# Altium PCB A5_KALIP.PcbDoc
Units mm, origin at the board's own origin, x right, y up, seen from the top; angles counter-clockwise.
Board outline 153.5 x 220 mm, 4 copper layers (Top Layer, Mid-Layer 1, Mid-Layer 2, Bottom Layer); 108 components, 0 nets, 376 pads, 72 vias.
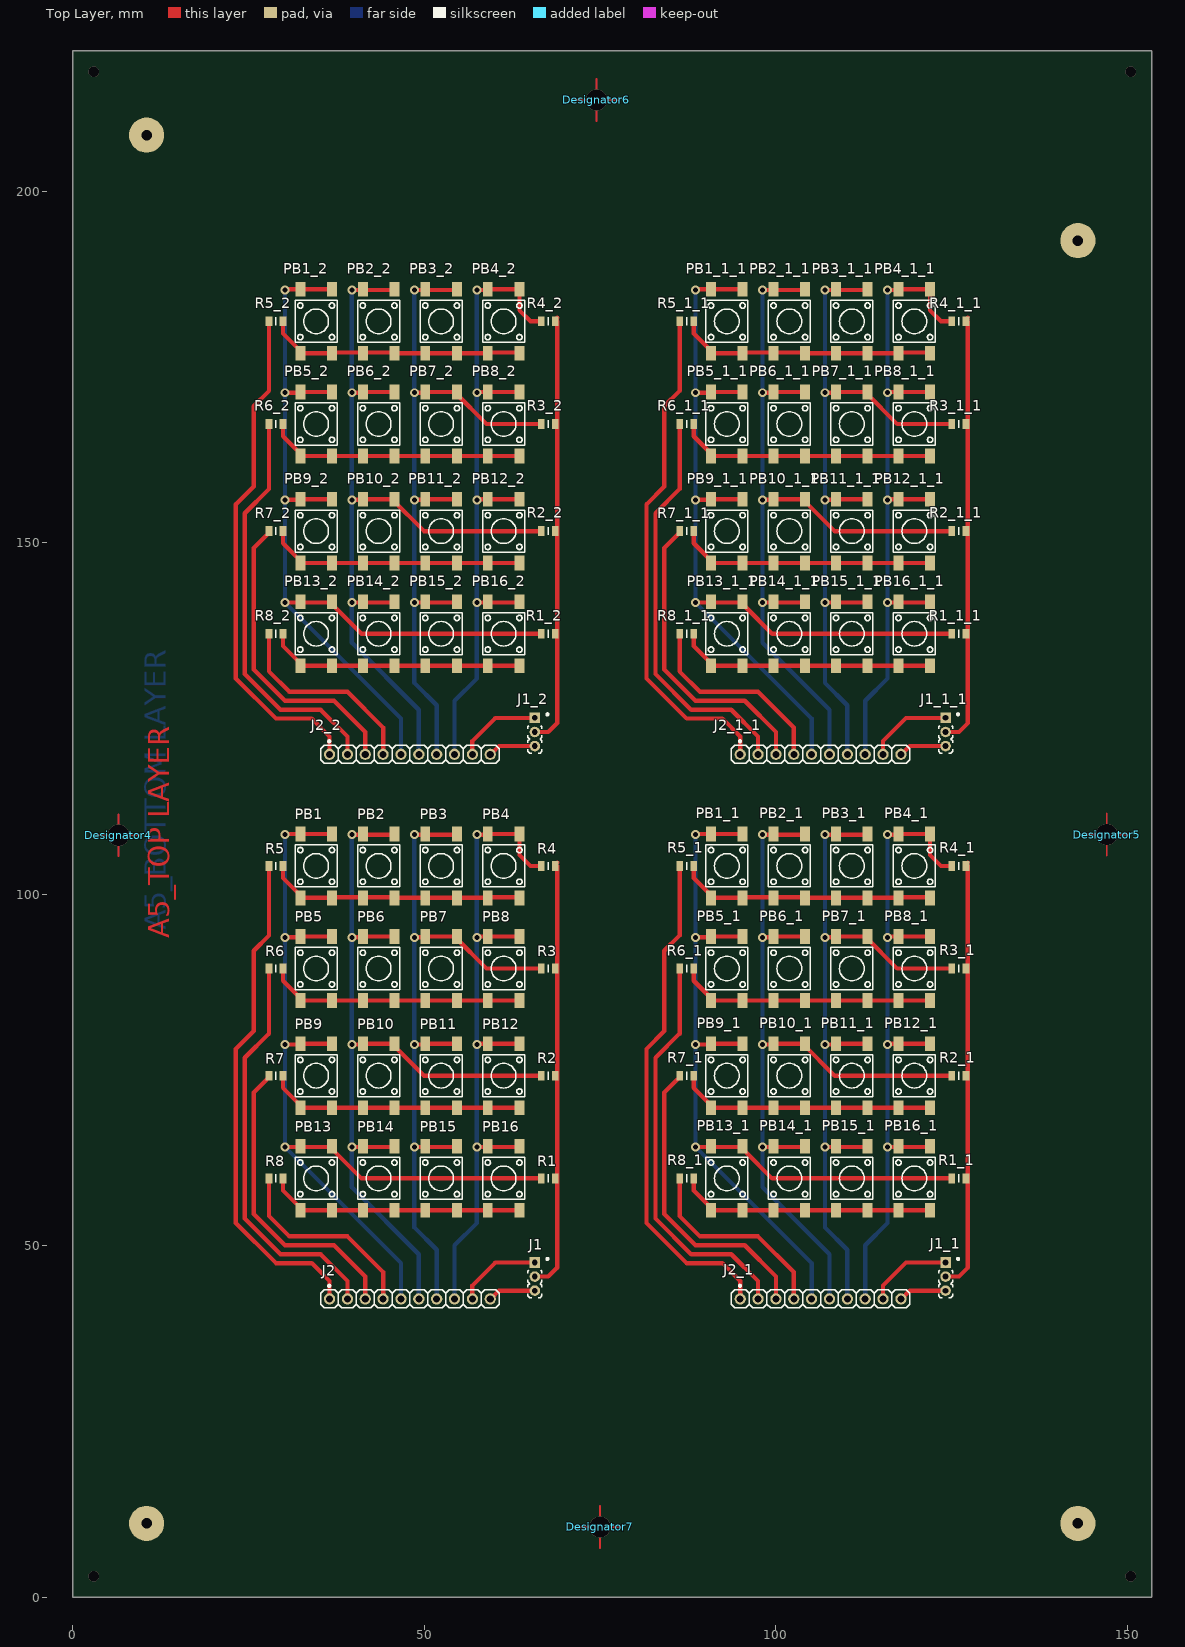
[diagram p0: Top Layer view]
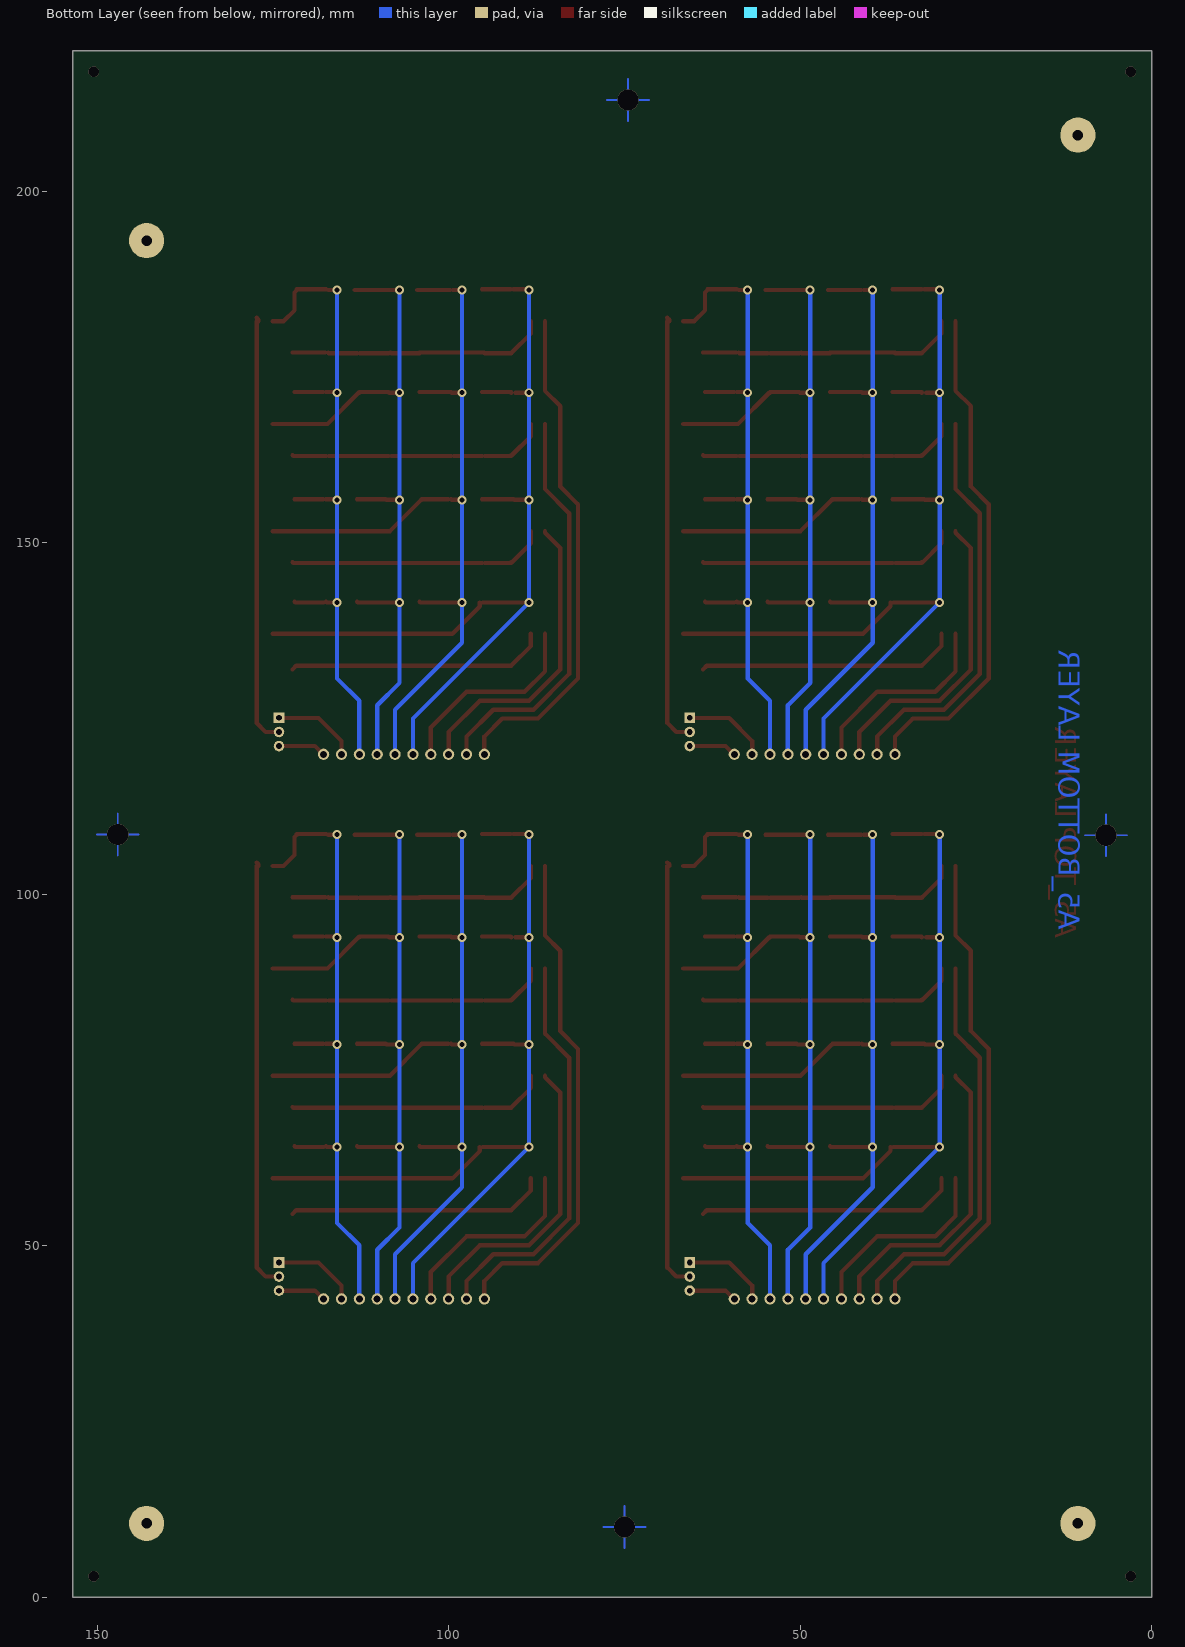
[diagram p1: Bottom Layer view, seen from below]
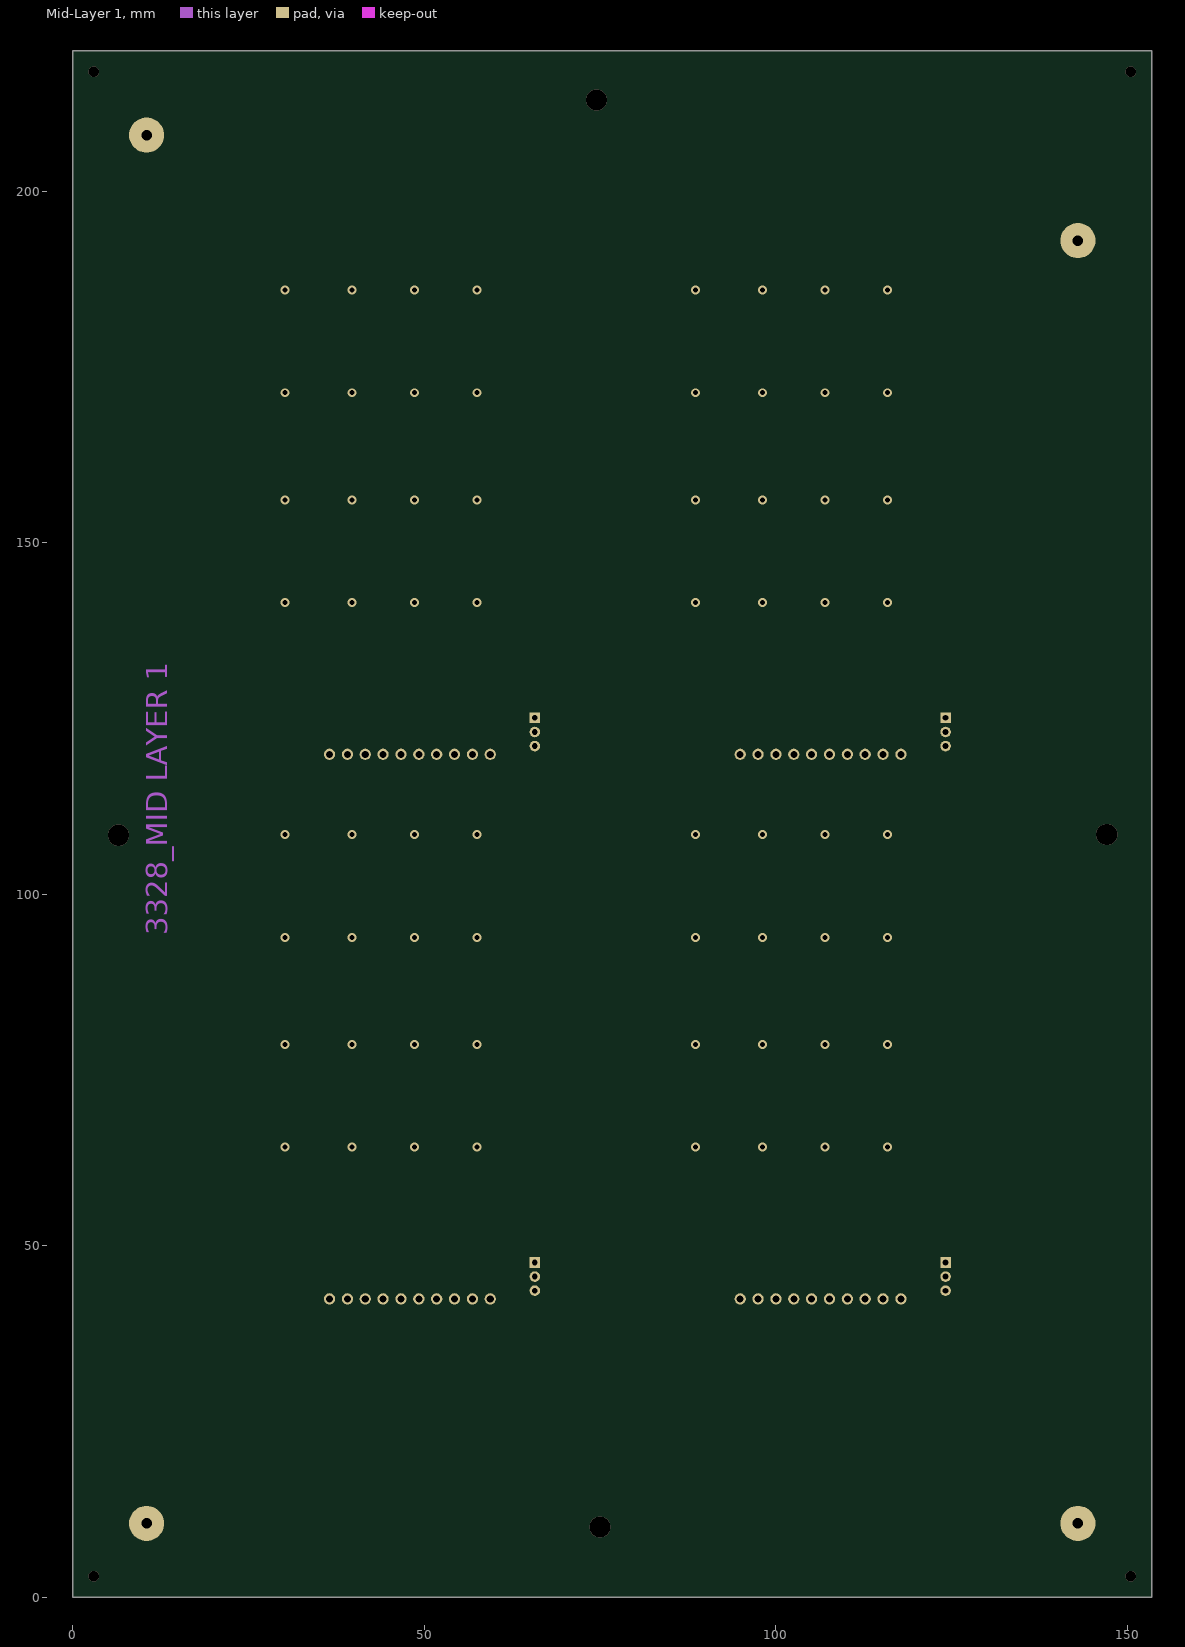
[diagram p2: Mid-Layer 1]
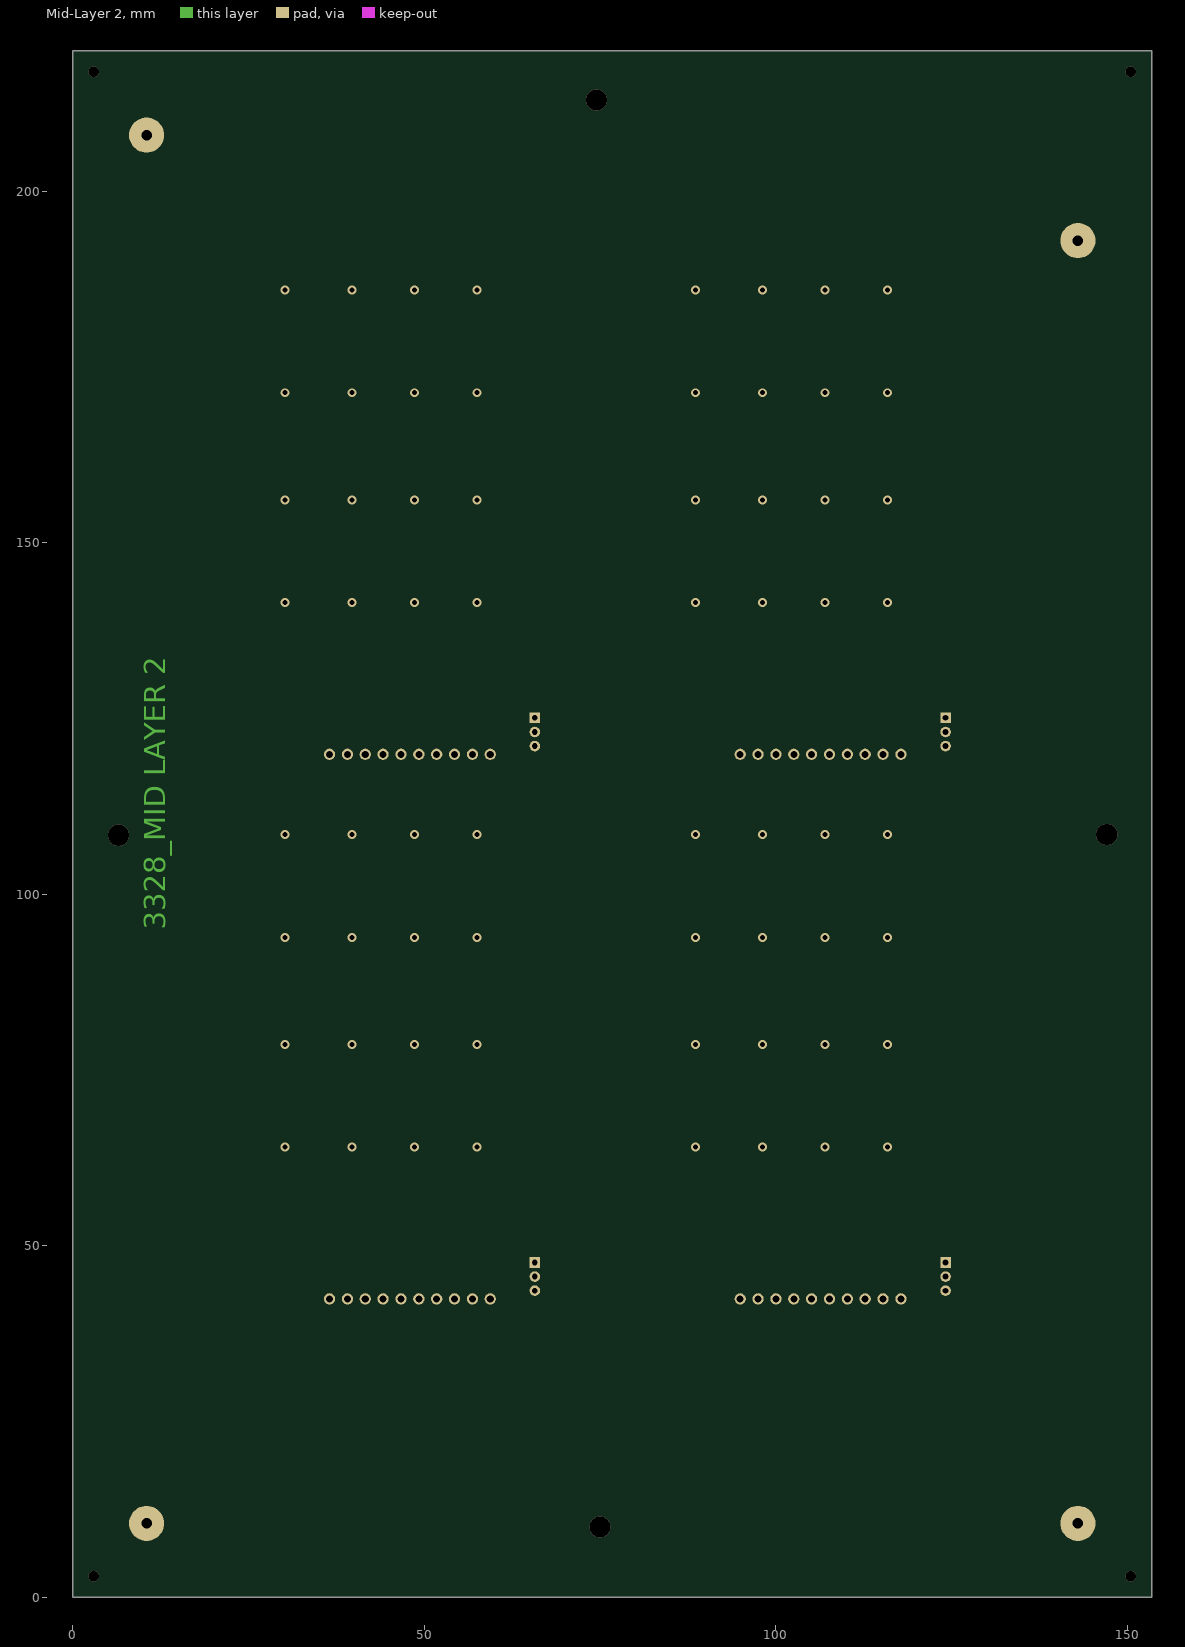
[diagram p3: Mid-Layer 2]

## Layer stack, top to bottom
Top Solder: solder mask 0.0102, Solder Resist, Dk 3.5
Top Layer: signal copper 0.0356
Dielectric 1: dielectric 0.32, FR-4, Dk 4.8
Mid-Layer 1: signal copper 0.0356
Dielectric2: dielectric 0.32, FR-4, Dk 4.8
Mid-Layer 2: signal copper 0.0356
Dielectric3: dielectric 0.32, FR-4, Dk 4.8
Bottom Layer: signal copper 0.0356
Bottom Solder: solder mask 0.0102, Solder Resist, Dk 3.5

## Board outline
0,0 0,220 153.5,220 153.5,0

## Design rules (kind name [scope] priority, off if disabled: settings)
Clearance [All] p1: gap=0.254 ignorepadtopadclearanceinfootprint=FALSE except(0: Arc-Hole Track-Hole SMDPad-Hole THPad-Hole Via-Hole Fill-Hole Poly-Hole Region-Hole Text-Hole)
PolygonConnect [All] p1: connectstyle=Relief reliefconductorwidth=0.254 reliefentries=4 polygonreliefangle="90 Angle" airgapwidth=0.254
RoutingVias [All] p1: holewidth=0.711 width=1.27 viastyle="Through Hole" minholewidth=0.711 minwidth=1.27 maxholewidth=0.711 maxwidth=1.27
SolderMaskExpansion SolderMaskExpansion_Via [IsVia] p1: expansion=0.102 istentingtop=TRUE
SolderMaskExpansion [All] p2: expansion=0.125 istentingtop=FALSE
Width [All] p1: maxlimit=0.254 minlimit=0.254 preferedwidth=0.254
30 further rules are at their usual default settings.

## Components (designator, comment, footprint, x,y, rotation, side; value= is the part's Value field where it differs from the comment)
Designator4 "Comment" PCBCOMPONENT_1 6.5,108.4 r0 top
Designator5 "Comment" PCBCOMPONENT_1 147.1,108.5 r0 top
Designator6 "Comment" PCBCOMPONENT_1 74.5,213 r0 top
Designator7 "Comment" PCBCOMPONENT_1 75,10 r0 top
J1 "" HARWIN_M22-2010305 65.74,47.62 r270 top
J1_1 "" HARWIN_M22-2010305 124.16,47.62 r270 top (schematic designator J1)
J1_1_1 "" HARWIN_M22-2010305 124.16,125.09 r270 top (schematic designator J1)
J1_2 "" HARWIN_M22-2010305 65.74,125.09 r270 top (schematic designator J1)
J2 "" SIP10 36.53,42.445 r0 top
J2_1 "" SIP10 94.95,42.445 r0 top (schematic designator J2)
J2_1_1 "" SIP10 94.95,119.915 r0 top (schematic designator J2)
J2_2 "" SIP10 36.53,119.915 r0 top (schematic designator J2)
PB1 "" PB_TYCO_FSM6JSMA 34.625,104.04 r0 top
PB1_1 "" PB_TYCO_FSM6JSMA 93.045,104.04 r0 top (schematic designator PB1)
PB1_1_1 "" PB_TYCO_FSM6JSMA 93.045,181.51 r0 top (schematic designator PB1)
PB1_2 "" PB_TYCO_FSM6JSMA 34.625,181.51 r0 top (schematic designator PB1)
PB2 "" PB_TYCO_FSM6JSMA 43.515,104.04 r0 top
PB2_1 "" PB_TYCO_FSM6JSMA 101.935,104.04 r0 top (schematic designator PB2)
PB2_1_1 "" PB_TYCO_FSM6JSMA 101.935,181.51 r0 top (schematic designator PB2)
PB2_2 "" PB_TYCO_FSM6JSMA 43.515,181.51 r0 top (schematic designator PB2)
PB3 "" PB_TYCO_FSM6JSMA 52.405,104.04 r0 top
PB3_1 "" PB_TYCO_FSM6JSMA 110.825,104.04 r0 top (schematic designator PB3)
PB3_1_1 "" PB_TYCO_FSM6JSMA 110.825,181.51 r0 top (schematic designator PB3)
PB3_2 "" PB_TYCO_FSM6JSMA 52.405,181.51 r0 top (schematic designator PB3)
PB4 "" PB_TYCO_FSM6JSMA 61.295,104.04 r0 top
PB4_1 "" PB_TYCO_FSM6JSMA 119.715,104.04 r0 top (schematic designator PB4)
PB4_1_1 "" PB_TYCO_FSM6JSMA 119.715,181.51 r0 top (schematic designator PB4)
PB4_2 "" PB_TYCO_FSM6JSMA 61.295,181.51 r0 top (schematic designator PB4)
PB5 "" PB_TYCO_FSM6JSMA 34.625,89.435 r0 top
PB5_1 "" PB_TYCO_FSM6JSMA 93.045,89.435 r0 top (schematic designator PB5)
PB5_1_1 "" PB_TYCO_FSM6JSMA 93.045,166.905 r0 top (schematic designator PB5)
PB5_2 "" PB_TYCO_FSM6JSMA 34.625,166.905 r0 top (schematic designator PB5)
PB6 "" PB_TYCO_FSM6JSMA 43.515,89.435 r0 top
PB6_1 "" PB_TYCO_FSM6JSMA 101.935,89.435 r0 top (schematic designator PB6)
PB6_1_1 "" PB_TYCO_FSM6JSMA 101.935,166.905 r0 top (schematic designator PB6)
PB6_2 "" PB_TYCO_FSM6JSMA 43.515,166.905 r0 top (schematic designator PB6)
PB7 "" PB_TYCO_FSM6JSMA 52.405,89.435 r0 top
PB7_1 "" PB_TYCO_FSM6JSMA 110.825,89.435 r0 top (schematic designator PB7)
PB7_1_1 "" PB_TYCO_FSM6JSMA 110.825,166.905 r0 top (schematic designator PB7)
PB7_2 "" PB_TYCO_FSM6JSMA 52.405,166.905 r0 top (schematic designator PB7)
PB8 "" PB_TYCO_FSM6JSMA 61.295,89.435 r0 top
PB8_1 "" PB_TYCO_FSM6JSMA 119.715,89.435 r0 top (schematic designator PB8)
PB8_1_1 "" PB_TYCO_FSM6JSMA 119.715,166.905 r0 top (schematic designator PB8)
PB8_2 "" PB_TYCO_FSM6JSMA 61.295,166.905 r0 top (schematic designator PB8)
PB9 "" PB_TYCO_FSM6JSMA 34.625,74.195 r0 top
PB9_1 "" PB_TYCO_FSM6JSMA 93.045,74.195 r0 top (schematic designator PB9)
PB9_1_1 "" PB_TYCO_FSM6JSMA 93.045,151.665 r0 top (schematic designator PB9)
PB9_2 "" PB_TYCO_FSM6JSMA 34.625,151.665 r0 top (schematic designator PB9)
PB10 "" PB_TYCO_FSM6JSMA 43.515,74.195 r0 top
PB10_1 "" PB_TYCO_FSM6JSMA 101.935,74.195 r0 top (schematic designator PB10)
PB10_1_1 "" PB_TYCO_FSM6JSMA 101.935,151.665 r0 top (schematic designator PB10)
PB10_2 "" PB_TYCO_FSM6JSMA 43.515,151.665 r0 top (schematic designator PB10)
PB11 "" PB_TYCO_FSM6JSMA 52.405,74.195 r0 top
PB11_1 "" PB_TYCO_FSM6JSMA 110.825,74.195 r0 top (schematic designator PB11)
PB11_1_1 "" PB_TYCO_FSM6JSMA 110.825,151.665 r0 top (schematic designator PB11)
PB11_2 "" PB_TYCO_FSM6JSMA 52.405,151.665 r0 top (schematic designator PB11)
PB12 "" PB_TYCO_FSM6JSMA 61.295,74.195 r0 top
PB12_1 "" PB_TYCO_FSM6JSMA 119.715,74.195 r0 top (schematic designator PB12)
PB12_1_1 "" PB_TYCO_FSM6JSMA 119.715,151.665 r0 top (schematic designator PB12)
PB12_2 "" PB_TYCO_FSM6JSMA 61.295,151.665 r0 top (schematic designator PB12)
PB13 "" PB_TYCO_FSM6JSMA 34.625,59.59 r0 top
PB13_1 "" PB_TYCO_FSM6JSMA 93.045,59.59 r0 top (schematic designator PB13)
PB13_1_1 "" PB_TYCO_FSM6JSMA 93.045,137.06 r0 top (schematic designator PB13)
PB13_2 "" PB_TYCO_FSM6JSMA 34.625,137.06 r0 top (schematic designator PB13)
PB14 "" PB_TYCO_FSM6JSMA 43.515,59.59 r0 top
PB14_1 "" PB_TYCO_FSM6JSMA 101.935,59.59 r0 top (schematic designator PB14)
PB14_1_1 "" PB_TYCO_FSM6JSMA 101.935,137.06 r0 top (schematic designator PB14)
PB14_2 "" PB_TYCO_FSM6JSMA 43.515,137.06 r0 top (schematic designator PB14)
PB15 "" PB_TYCO_FSM6JSMA 52.405,59.59 r0 top
PB15_1 "" PB_TYCO_FSM6JSMA 110.825,59.59 r0 top (schematic designator PB15)
PB15_1_1 "" PB_TYCO_FSM6JSMA 110.825,137.06 r0 top (schematic designator PB15)
PB15_2 "" PB_TYCO_FSM6JSMA 52.405,137.06 r0 top (schematic designator PB15)
PB16 "" PB_TYCO_FSM6JSMA 61.295,59.59 r0 top
PB16_1 "" PB_TYCO_FSM6JSMA 119.715,59.59 r0 top (schematic designator PB16)
PB16_1_1 "" PB_TYCO_FSM6JSMA 119.715,137.06 r0 top (schematic designator PB16)
PB16_2 "" PB_TYCO_FSM6JSMA 61.295,137.06 r0 top (schematic designator PB16)
R1 "10K" RESC2012X60N 67.645,59.59 r0 top
R1_1 "10K" RESC2012X60N 126.065,59.59 r0 top (schematic designator R1)
R1_1_1 "10K" RESC2012X60N 126.065,137.06 r0 top (schematic designator R1)
R1_2 "10K" RESC2012X60N 67.645,137.06 r0 top (schematic designator R1)
R2 "10K" RESC2012X60N 67.645,74.195 r0 top
R2_1 "10K" RESC2012X60N 126.065,74.195 r0 top (schematic designator R2)
R2_1_1 "10K" RESC2012X60N 126.065,151.665 r0 top (schematic designator R2)
R2_2 "10K" RESC2012X60N 67.645,151.665 r0 top (schematic designator R2)
R3 "10K" RESC2012X60N 67.645,89.435 r0 top
R3_1 "10K" RESC2012X60N 126.065,89.435 r0 top (schematic designator R3)
R3_1_1 "10K" RESC2012X60N 126.065,166.905 r0 top (schematic designator R3)
R3_2 "10K" RESC2012X60N 67.645,166.905 r0 top (schematic designator R3)
R4 "10K" RESC2012X60N 67.645,104.04 r0 top
R4_1 "10K" RESC2012X60N 126.065,104.04 r0 top (schematic designator R4)
R4_1_1 "10K" RESC2012X60N 126.065,181.51 r0 top (schematic designator R4)
R4_2 "10K" RESC2012X60N 67.645,181.51 r0 top (schematic designator R4)
R5 "330" RESC2012X60N 28.91,104.04 r180 top
R5_1 "330" RESC2012X60N 87.33,104.04 r180 top (schematic designator R5)
R5_1_1 "330" RESC2012X60N 87.33,181.51 r180 top (schematic designator R5)
R5_2 "330" RESC2012X60N 28.91,181.51 r180 top (schematic designator R5)
R6 "330" RESC2012X60N 28.91,89.435 r180 top
R6_1 "330" RESC2012X60N 87.33,89.435 r180 top (schematic designator R6)
R6_1_1 "330" RESC2012X60N 87.33,166.905 r180 top (schematic designator R6)
R6_2 "330" RESC2012X60N 28.91,166.905 r180 top (schematic designator R6)
R7 "330" RESC2012X60N 28.91,74.195 r180 top
R7_1 "330" RESC2012X60N 87.33,74.195 r180 top (schematic designator R7)
R7_1_1 "330" RESC2012X60N 87.33,151.665 r180 top (schematic designator R7)
R7_2 "330" RESC2012X60N 28.91,151.665 r180 top (schematic designator R7)
R8 "330" RESC2012X60N 28.91,59.59 r180 top
R8_1 "330" RESC2012X60N 87.33,59.59 r180 top (schematic designator R8)
R8_1_1 "330" RESC2012X60N 87.33,137.06 r180 top (schematic designator R8)
R8_2 "330" RESC2012X60N 28.91,137.06 r180 top (schematic designator R8)

## Footprints (in the part's own frame and the unit in brackets; to place one, negate y for a bottom-side part, rotate by r counter-clockwise, add the part's x,y. Pads: shape width x height; smd on the part's side, far side on the other; paste and mask are expansions set on the pad)
HARWIN_M22-2010305 [mm] "3 Contacts - Pitch 2mm - Single Row Through Mount Straight Header (Post Lead = 3.5mm, Tail Lead 3.4mm, Insulator 1.5mm)"
  rect 1.5x1.5 hole 0.8: 1(0,0)
  round 1.5 hole 0.8: 2(2,0) 3(4,0)
  silkscreen extent -0.66,-1 5,1.93, body extent -1,-1 5,1, height 5
PB_TYCO_FSM6JSMA [mm] "Body 6mm x 6mm, Surface Mount Tactile Switches, TYCO FSM6JSMA Series"
  rect 1.4x2.1 smd: 1(-2.25,4.55) 2(-2.25,-4.55) 3(2.25,4.55) 4(2.25,-4.55)
  silkscreen extent -3,-3 3,3, body extent -3,-5 3,5, height 7.11
PCBCOMPONENT_1 [mm]
  Top Layer lines w0.25: -3,0 3,0 ; 0,-3 0,3
  Bottom Layer lines w0.25: -3,0 3,0 ; 0,-3 0,3
RESC2012X60N [mm] "Chip Resistor, EIA 0805, Metric 2012, Body 2.0x1.2mm, IPC Medium Density"
  rect 0.95x1.4 smd: 1(-1,0) 2(1,0)
  silkscreen extent 0,-0.55 0,0.55, body extent -1.1,-0.67 1.1,0.68, height 0.6
SIP10 [mm] "10 Contact 2.54mm Pitch Single-In-Line Header Strip - Top Pin Ø0.46mm - Bottom Pin Ø0.69mm"
  round 1.6 hole 1: 1(0,0) 2(2.54,0) 3(5.08,0) 4(7.62,0) 5(10.16,0) 6(12.7,0) 7(15.24,0) 8(17.78,0) 9(20.32,0) 10(22.86,0)
  silkscreen extent -1.27,-1.27 24.13,2, body extent -1.27,-10 24.13,2.54, height 4.5

## Part data
J1 J1_1 J1_1_1 J1_2: library part "Connector 3 Male", "Connector 3 Male"
J2 J2_1 J2_1_1 J2_2: library part "Connector 10 Male", "Connector 10 Male"
PB1 PB1_1 PB1_1_1 PB1_2 PB2 PB2_1 PB2_1_1 PB2_2 PB3 PB3_1 PB3_1_1 PB3_2 PB4 PB4_1 PB4_1_1 PB4_2 PB5 PB5_1 PB5_1_1 PB5_2 PB6 PB6_1 PB6_1_1 PB6_2 PB7 PB7_1 PB7_1_1 PB7_2 PB8 PB8_1 PB8_1_1 PB8_2 PB9 PB9_1 PB9_1_1 PB9_2 PB10 PB10_1 PB10_1_1 PB10_2 PB11 PB11_1 PB11_1_1 PB11_2 PB12 PB12_1 PB12_1_1 PB12_2 PB13 PB13_1 PB13_1_1 PB13_2 PB14 PB14_1 PB14_1_1 PB14_2 PB15 PB15_1 PB15_1_1 PB15_2 PB16 PB16_1 PB16_1_1 PB16_2: library part "PB SPST 1NO-2NO 34CASE", "Push-Button Switch SPDT"
R1 R1_1 R1_1_1 R1_2 R2 R2_1 R2_1_1 R2_2 R3 R3_1 R3_1_1 R3_2 R4 R4_1 R4_1_1 R4_2 R5 R5_1 R5_1_1 R5_2 R6 R6_1 R6_1_1 R6_2 R7 R7_1 R7_1_1 R7_2 R8 R8_1 R8_1_1 R8_2: library part Resistor, "Resistor"

## Free pads (board coordinates)
  round 5 hole 1.5: ""(10.5,10.5) ""(10.5,208) ""(143,10.5) ""(143,193)

## Via types
v1: diameter 1.27, hole 0.711, Top Layer to Bottom Layer, tented both sides, 64 vias
v2: diameter 3, hole 3, Top Layer to Bottom Layer, 4 vias
v3: diameter 1.5, hole 1.5, Top Layer to Bottom Layer, tented both sides, 4 vias

## Nets (pads, with @x,y where several pads share a name; then routed paths per layer and width w, separated by ;. In a path a pad name is that pad's centre, name@x,y a point inside that pad or via, vN(x,y) a via of type N, cw(c..) or ccw(c..) an arc to the next point about the centre after c; other vN are vias at no path point)
pads on no net: J1.1 J1.2 J1.3 J1_1.1 J1_1.2 J1_1.3 J1_1_1.1 J1_1_1.2 J1_1_1.3 J1_2.1 J1_2.2 J1_2.3 J2.1 J2.2 J2.3 J2.4 J2.5 J2.6 J2.7 J2.8 J2.9 J2.10 J2_1.1 J2_1.2 J2_1.3 J2_1.4 J2_1.5 J2_1.6 J2_1.7 J2_1.8 J2_1.9 J2_1.10 J2_1_1.1 J2_1_1.2 J2_1_1.3 J2_1_1.4 J2_1_1.5 J2_1_1.6 J2_1_1.7 J2_1_1.8 J2_1_1.9 J2_1_1.10 J2_2.1 J2_2.2 J2_2.3 J2_2.4 J2_2.5 J2_2.6 J2_2.7 J2_2.8 J2_2.9 J2_2.10 PB1.1 PB1.2 PB1.3 PB1.4 PB1_1.1 PB1_1.2 PB1_1.3 PB1_1.4 PB1_1_1.1 PB1_1_1.2 PB1_1_1.3 PB1_1_1.4 PB1_2.1 PB1_2.2 PB1_2.3 PB1_2.4 PB2.1 PB2.2 PB2.3 PB2.4 PB2_1.1 PB2_1.2 PB2_1.3 PB2_1.4 PB2_1_1.1 PB2_1_1.2 PB2_1_1.3 PB2_1_1.4 PB2_2.1 PB2_2.2 PB2_2.3 PB2_2.4 PB3.1 PB3.2 PB3.3 PB3.4 PB3_1.1 PB3_1.2 PB3_1.3 PB3_1.4 PB3_1_1.1 PB3_1_1.2 PB3_1_1.3 PB3_1_1.4 PB3_2.1 PB3_2.2 PB3_2.3 PB3_2.4 PB4.1 PB4.2 PB4.3 PB4.4 PB4_1.1 PB4_1.2 PB4_1.3 PB4_1.4 PB4_1_1.1 PB4_1_1.2 PB4_1_1.3 PB4_1_1.4 PB4_2.1 PB4_2.2 PB4_2.3 PB4_2.4 PB5.1 PB5.2 PB5.3 PB5.4 PB5_1.1 PB5_1.2 PB5_1.3 PB5_1.4 PB5_1_1.1 PB5_1_1.2 PB5_1_1.3 PB5_1_1.4 PB5_2.1 PB5_2.2 PB5_2.3 PB5_2.4 PB6.1 PB6.2 PB6.3 PB6.4 PB6_1.1 PB6_1.2 PB6_1.3 PB6_1.4 PB6_1_1.1 PB6_1_1.2 PB6_1_1.3 PB6_1_1.4 PB6_2.1 PB6_2.2 PB6_2.3 PB6_2.4 PB7.1 PB7.2 PB7.3 PB7.4 PB7_1.1 PB7_1.2 PB7_1.3 PB7_1.4 PB7_1_1.1 PB7_1_1.2 PB7_1_1.3 PB7_1_1.4 PB7_2.1 PB7_2.2 PB7_2.3 PB7_2.4 PB8.1 PB8.2 PB8.3 PB8.4 PB8_1.1 PB8_1.2 PB8_1.3 PB8_1.4 PB8_1_1.1 PB8_1_1.2 PB8_1_1.3 PB8_1_1.4 PB8_2.1 PB8_2.2 PB8_2.3 PB8_2.4 PB9.1 PB9.2 PB9.3 PB9.4 PB9_1.1 PB9_1.2 PB9_1.3 PB9_1.4 PB9_1_1.1 PB9_1_1.2 PB9_1_1.3 PB9_1_1.4 PB9_2.1 PB9_2.2 PB9_2.3 PB9_2.4 PB10.1 PB10.2 PB10.3 PB10.4 PB10_1.1 PB10_1.2 PB10_1.3 PB10_1.4 PB10_1_1.1 PB10_1_1.2 PB10_1_1.3 PB10_1_1.4 PB10_2.1 PB10_2.2 PB10_2.3 PB10_2.4 PB11.1 PB11.2 PB11.3 PB11.4 PB11_1.1 PB11_1.2 PB11_1.3 PB11_1.4 PB11_1_1.1 PB11_1_1.2 PB11_1_1.3 PB11_1_1.4 PB11_2.1 PB11_2.2 PB11_2.3 PB11_2.4 PB12.1 PB12.2 PB12.3 PB12.4 PB12_1.1 PB12_1.2 PB12_1.3 PB12_1.4 PB12_1_1.1 PB12_1_1.2 PB12_1_1.3 PB12_1_1.4 PB12_2.1 PB12_2.2 PB12_2.3 PB12_2.4 PB13.1 PB13.2 PB13.3 PB13.4 PB13_1.1 PB13_1.2 PB13_1.3 PB13_1.4 PB13_1_1.1 PB13_1_1.2 PB13_1_1.3 PB13_1_1.4 PB13_2.1 PB13_2.2 PB13_2.3 PB13_2.4 PB14.1 PB14.2 PB14.3 PB14.4 PB14_1.1 PB14_1.2 PB14_1.3 PB14_1.4 PB14_1_1.1 PB14_1_1.2 PB14_1_1.3 PB14_1_1.4 PB14_2.1 PB14_2.2 PB14_2.3 PB14_2.4 PB15.1 PB15.2 PB15.3 PB15.4 PB15_1.1 PB15_1.2 PB15_1.3 PB15_1.4 PB15_1_1.1 PB15_1_1.2 PB15_1_1.3 PB15_1_1.4 PB15_2.1 PB15_2.2 PB15_2.3 PB15_2.4 PB16.1 PB16.2 PB16.3 PB16.4 PB16_1.1 PB16_1.2 PB16_1.3 PB16_1.4 PB16_1_1.1 PB16_1_1.2 PB16_1_1.3 PB16_1_1.4 PB16_2.1 PB16_2.2 PB16_2.3 PB16_2.4 R1.1 R1.2 R1_1.1 R1_1.2 R1_1_1.1 R1_1_1.2 R1_2.1 R1_2.2 R2.1 R2.2 R2_1.1 R2_1.2 R2_1_1.1 R2_1_1.2 R2_2.1 R2_2.2 R3.1 R3.2 R3_1.1 R3_1.2 R3_1_1.1 R3_1_1.2 R3_2.1 R3_2.2 R4.1 R4.2 R4_1.1 R4_1.2 R4_1_1.1 R4_1_1.2 R4_2.1 R4_2.2 R5.1 R5.2 R5_1.1 R5_1.2 R5_1_1.1 R5_1_1.2 R5_2.1 R5_2.2 R6.1 R6.2 R6_1.1 R6_1.2 R6_1_1.1 R6_1_1.2 R6_2.1 R6_2.2 R7.1 R7.2 R7_1.1 R7_1.2 R7_1_1.1 R7_1_1.2 R7_2.1 R7_2.2 R8.1 R8.2 R8_1.1 R8_1.2 R8_1_1.1 R8_1_1.2 R8_2.1 R8_2.2
copper on no net: | length 3504.6
  Top Layer w0.61: 27.91,59.59 27.91,54.24 30.815,51.335 39.07,51.335 44.15,46.255 44.15,42.445 ; 27.91,74.195 27.91,73.97 25.735,71.795 25.735,54.51 30.18,50.065 37.165,50.065 41.61,45.62 41.61,42.445 ; 27.91,89.435 27.91,80.18 24.465,76.735 24.465,53.875 29.545,48.795 35.26,48.795 39.07,44.985 39.07,42.445 ; 27.91,104.04 27.91,94.15 25.735,91.975 25.735,80.545 23.195,78.005 23.195,53.24 28.91,47.525 33.99,47.525 36.53,44.985 36.53,42.445 ; 27.91,137.06 27.91,131.71 30.815,128.805 39.07,128.805 44.15,123.725 44.15,119.915 ; 27.91,151.665 27.91,151.44 25.735,149.265 25.735,131.98 30.18,127.535 37.165,127.535 41.61,123.09 41.61,119.915 ; 27.91,166.905 27.91,157.65 24.465,154.205 24.465,131.345 29.545,126.265 35.26,126.265 39.07,122.455 39.07,119.915 ; 27.91,181.51 27.91,171.62 25.735,169.445 25.735,158.015 23.195,155.475 23.195,130.71 28.91,124.995 33.99,124.995 36.53,122.455 36.53,119.915 ; 29.91,59.59 29.91,57.855 32.62,55.145 32.72,55.145 ; 29.91,74.195 29.91,72.46 32.62,69.75 32.72,69.75 ; 29.91,89.435 29.91,87.7 32.62,84.99 32.72,84.99 ; 29.91,104.04 29.91,102.305 32.62,99.595 32.72,99.595 ; 29.91,137.06 29.91,135.325 32.62,132.615 32.72,132.615 ; 29.91,151.665 29.91,149.93 32.62,147.22 32.72,147.22 ; 29.91,166.905 29.91,165.17 32.62,162.46 32.72,162.46 ; 29.91,181.51 29.91,179.775 32.62,177.065 32.72,177.065 ; v1(30.18,64.035) 36.77,64.035 ; v1(30.18,78.64) 32.27,78.64 32.375,78.745 ; v1(30.18,93.88) 32.085,93.88 ; v1(30.18,108.485) 30.285,108.59 32.375,108.59 ; v1(30.18,141.505) 36.77,141.505 ; v1(30.18,156.11) 32.27,156.11 32.375,156.215 ; v1(30.18,171.35) 32.085,171.35 ; v1(30.18,185.955) 30.285,186.06 32.375,186.06 ; 32.615,78.745 36.875,78.745 ; 32.615,156.215 36.875,156.215 ; 32.72,55.04 36.875,55.04 41.265,55.04 45.765,55.04 50.155,55.04 54.655,55.04 59.045,55.04 63.305,55.04 63.835,54.51 ; 32.72,69.645 36.48,69.645 ; 32.72,84.885 36.48,84.885 ; 32.72,93.88 32.72,93.935 32.77,93.985 36.875,93.985 ; 32.72,99.49 36.48,99.49 36.53,99.54 36.53,99.595 45.765,99.595 ; 32.72,132.51 36.875,132.51 41.265,132.51 45.765,132.51 50.155,132.51 54.655,132.51 59.045,132.51 63.305,132.51 63.835,131.98 ; 32.72,147.115 36.48,147.115 ; 32.72,162.355 36.48,162.355 ; 32.72,171.35 32.72,171.405 32.77,171.455 36.875,171.455 ; 32.72,176.96 36.48,176.96 36.53,177.01 36.53,177.065 45.765,177.065 ; 32.77,108.59 36.875,108.59 ; 32.77,186.06 36.875,186.06 ; 36.875,69.645 41.265,69.645 45.765,69.645 50.155,69.645 54.655,69.645 59.045,69.645 63.545,69.645 63.73,69.645 63.835,69.75 ; 36.875,84.885 40.87,84.885 ; 36.875,147.115 41.265,147.115 45.765,147.115 50.155,147.115 54.655,147.115 59.045,147.115 63.545,147.115 63.73,147.115 63.835,147.22 ; 36.875,162.355 40.87,162.355 ; 37.165,64.035 37.165,63.5 41.075,59.59 66.645,59.59 ; 37.165,141.505 37.165,140.97 41.075,137.06 66.645,137.06 ; v1(39.705,64.035) 45.66,64.035 45.765,64.14 ; v1(39.705,78.64) 41.16,78.64 41.265,78.745 ; v1(39.705,93.88) 41.16,93.88 41.265,93.985 45.765,93.985 ; v1(39.705,108.485) 40.975,108.485 ; v1(39.705,141.505) 45.66,141.505 45.765,141.61 ; v1(39.705,156.11) 41.16,156.11 41.265,156.215 ; v1(39.705,171.35) 41.16,171.35 41.265,171.455 45.765,171.455 ; v1(39.705,185.955) 40.975,185.955 ; 41.265,84.885 45.765,84.885 49.76,84.885 ; 41.265,162.355 45.765,162.355 49.76,162.355 ; 41.37,108.485 46.055,108.485 ; 41.37,185.955 46.055,185.955 ; 41.66,78.745 45.42,78.745 ; 41.66,156.215 45.42,156.215 ; 45.42,78.64 45.52,78.64 49.965,74.195 66.645,74.195 ; 45.42,156.11 45.52,156.11 49.965,151.665 66.645,151.665 ; 45.765,99.49 49.76,99.49 49.865,99.595 ; 45.765,176.96 49.76,176.96 49.865,177.065 ; v1(48.595,64.035) 54.55,64.035 54.655,64.14 ; v1(48.595,78.64) 50.445,78.64 50.55,78.745 54.655,78.745 ; v1(48.595,93.88) 50.05,93.88 50.155,93.985 54.31,93.985 ; v1(48.595,108.485) 54.945,108.485 ; v1(48.595,141.505) 54.55,141.505 54.655,141.61 ; v1(48.595,156.11) 50.445,156.11 50.55,156.215 54.655,156.215 ; v1(48.595,171.35) 50.05,171.35 50.155,171.455 54.31,171.455 ; v1(48.595,185.955) 54.945,185.955 ; 50.155,84.885 54.655,84.885 58.65,84.885 ; 50.155,99.49 54.26,99.49 ; 50.155,162.355 54.655,162.355 58.65,162.355 ; 50.155,176.96 54.26,176.96 ; 54.31,93.88 54.41,93.88 58.855,89.435 66.645,89.435 ; 54.31,171.35 54.41,171.35 58.855,166.905 66.645,166.905 ; 54.655,99.49 58.65,99.49 58.755,99.595 ; 54.655,176.96 58.65,176.96 58.755,177.065 ; 56.85,42.445 56.85,44.35 60.12,47.62 65.74,47.62 ; 56.85,119.915 56.85,121.82 60.12,125.09 65.74,125.09 ; v1(57.485,64.035) 58.94,64.035 59.045,64.14 ; v1(57.485,78.64) 57.59,78.745 59.045,78.745 ; v1(57.485,93.88) 57.59,93.985 59.045,93.985 ; v1(57.485,108.485) 58.755,108.485 ; v1(57.485,141.505) 58.94,141.505 59.045,141.61 ; v1(57.485,156.11) 57.59,156.215 59.045,156.215 ; v1(57.485,171.35) 57.59,171.455 59.045,171.455 ; v1(57.485,185.955) 58.755,185.955 ; 59.045,84.885 63.545,84.885 63.73,84.885 63.835,84.99 ; 59.045,108.59 63.2,108.59 ; 59.045,162.355 63.545,162.355 63.73,162.355 63.835,162.46 ; 59.045,186.06 63.2,186.06 ; 59.15,99.595 63.835,99.595 ; 59.15,177.065 63.835,177.065 ; 59.39,42.445 59.464,42.445 60.639,43.62 65.74,43.62 ; 59.39,64.035 63.44,64.035 63.545,64.14 ; 59.39,119.915 59.464,119.915 60.639,121.09 65.74,121.09 ; 59.39,141.505 63.44,141.505 63.545,141.61 ; 59.44,78.745 63.545,78.745 ; 59.44,93.985 63.545,93.985 ; 59.44,156.215 63.545,156.215 ; 59.44,171.455 63.545,171.455 ; 63.2,108.485 63.545,108.14 63.545,105.6 65.105,104.04 66.645,104.04 ; 63.2,185.955 63.545,185.61 63.545,183.07 65.105,181.51 66.645,181.51 ; 65.74,45.62 67.645,45.62 68.915,46.89 68.915,74.195 68.915,89.435 68.915,104.04 ; 65.74,123.09 67.645,123.09 68.915,124.36 68.915,151.665 68.915,166.905 68.915,181.51 ; 68.645,104.04 68.645,104.265 68.915,104.535 ; 68.645,181.51 68.645,181.735 68.915,182.005 ; 86.33,59.59 86.33,54.24 89.235,51.335 97.49,51.335 102.57,46.255 102.57,42.445 ; 86.33,74.195 86.33,73.97 84.155,71.795 84.155,54.51 88.6,50.065 95.585,50.065 100.03,45.62 100.03,42.445 ; 86.33,89.435 86.33,80.18 82.885,76.735 82.885,53.875 87.965,48.795 93.68,48.795 97.49,44.985 97.49,42.445 ; 86.33,104.04 86.33,94.15 84.155,91.975 84.155,80.545 81.615,78.005 81.615,53.24 87.33,47.525 92.41,47.525 94.95,44.985 94.95,42.445 ; 86.33,137.06 86.33,131.71 89.235,128.805 97.49,128.805 102.57,123.725 102.57,119.915 ; 86.33,151.665 86.33,151.44 84.155,149.265 84.155,131.98 88.6,127.535 95.585,127.535 100.03,123.09 100.03,119.915 ; 86.33,166.905 86.33,157.65 82.885,154.205 82.885,131.345 87.965,126.265 93.68,126.265 97.49,122.455 97.49,119.915 ; 86.33,181.51 86.33,171.62 84.155,169.445 84.155,158.015 81.615,155.475 81.615,130.71 87.33,124.995 92.41,124.995 94.95,122.455 94.95,119.915 ; 88.33,59.59 88.33,57.855 91.04,55.145 91.14,55.145 ; 88.33,74.195 88.33,72.46 91.04,69.75 91.14,69.75 ; 88.33,89.435 88.33,87.7 91.04,84.99 91.14,84.99 ; 88.33,104.04 88.33,102.305 91.04,99.595 91.14,99.595 ; 88.33,137.06 88.33,135.325 91.04,132.615 91.14,132.615 ; 88.33,151.665 88.33,149.93 91.04,147.22 91.14,147.22 ; 88.33,166.905 88.33,165.17 91.04,162.46 91.14,162.46 ; 88.33,181.51 88.33,179.775 91.04,177.065 91.14,177.065 ; v1(88.6,64.035) 95.19,64.035 ; v1(88.6,78.64) 90.69,78.64 90.795,78.745 ; v1(88.6,93.88) 90.505,93.88 ; v1(88.6,108.485) 88.705,108.59 90.795,108.59 ; v1(88.6,141.505) 95.19,141.505 ; v1(88.6,156.11) 90.69,156.11 90.795,156.215 ; v1(88.6,171.35) 90.505,171.35 ; v1(88.6,185.955) 88.705,186.06 90.795,186.06 ; 91.035,78.745 95.295,78.745 ; 91.035,156.215 95.295,156.215 ; 91.14,55.04 95.295,55.04 99.685,55.04 104.185,55.04 108.575,55.04 113.075,55.04 117.465,55.04 121.725,55.04 122.255,54.51 ; 91.14,69.645 94.9,69.645 ; 91.14,84.885 94.9,84.885 ; 91.14,93.88 91.14,93.935 91.19,93.985 95.295,93.985 ; 91.14,99.49 94.9,99.49 94.95,99.54 94.95,99.595 104.185,99.595 ; 91.14,132.51 95.295,132.51 99.685,132.51 104.185,132.51 108.575,132.51 113.075,132.51 117.465,132.51 121.725,132.51 122.255,131.98 ; 91.14,147.115 94.9,147.115 ; 91.14,162.355 94.9,162.355 ; 91.14,171.35 91.14,171.405 91.19,171.455 95.295,171.455 ; 91.14,176.96 94.9,176.96 94.95,177.01 94.95,177.065 104.185,177.065 ; 91.19,108.59 95.295,108.59 ; 91.19,186.06 95.295,186.06 ; 95.295,69.645 99.685,69.645 104.185,69.645 108.575,69.645 113.075,69.645 117.465,69.645 121.965,69.645 122.15,69.645 122.255,69.75 ; 95.295,84.885 99.29,84.885 ; 95.295,147.115 99.685,147.115 104.185,147.115 108.575,147.115 113.075,147.115 117.465,147.115 121.965,147.115 122.15,147.115 122.255,147.22 ; 95.295,162.355 99.29,162.355 ; 95.585,64.035 95.585,63.5 99.495,59.59 125.065,59.59 ; 95.585,141.505 95.585,140.97 99.495,137.06 125.065,137.06 ; v1(98.125,64.035) 104.08,64.035 104.185,64.14 ; v1(98.125,78.64) 99.58,78.64 99.685,78.745 ; v1(98.125,93.88) 99.58,93.88 99.685,93.985 104.185,93.985 ; v1(98.125,108.485) 99.395,108.485 ; v1(98.125,141.505) 104.08,141.505 104.185,141.61 ; v1(98.125,156.11) 99.58,156.11 99.685,156.215 ; v1(98.125,171.35) 99.58,171.35 99.685,171.455 104.185,171.455 ; v1(98.125,185.955) 99.395,185.955 ; 99.685,84.885 104.185,84.885 108.18,84.885 ; 99.685,162.355 104.185,162.355 108.18,162.355 ; 99.79,108.485 104.475,108.485 ; 99.79,185.955 104.475,185.955 ; 100.08,78.745 103.84,78.745 ; 100.08,156.215 103.84,156.215 ; 103.84,78.64 103.94,78.64 108.385,74.195 125.065,74.195 ; 103.84,156.11 103.94,156.11 108.385,151.665 125.065,151.665 ; 104.185,99.49 108.18,99.49 108.285,99.595 ; 104.185,176.96 108.18,176.96 108.285,177.065 ; v1(107.015,64.035) 112.97,64.035 113.075,64.14 ; v1(107.015,78.64) 108.865,78.64 108.97,78.745 113.075,78.745 ; v1(107.015,93.88) 108.47,93.88 108.575,93.985 112.73,93.985 ; v1(107.015,108.485) 113.365,108.485 ; v1(107.015,141.505) 112.97,141.505 113.075,141.61 ; v1(107.015,156.11) 108.865,156.11 108.97,156.215 113.075,156.215 ; v1(107.015,171.35) 108.47,171.35 108.575,171.455 112.73,171.455 ; v1(107.015,185.955) 113.365,185.955 ; 108.575,84.885 113.075,84.885 117.07,84.885 ; 108.575,99.49 112.68,99.49 ; 108.575,162.355 113.075,162.355 117.07,162.355 ; 108.575,176.96 112.68,176.96 ; 112.73,93.88 112.83,93.88 117.275,89.435 125.065,89.435 ; 112.73,171.35 112.83,171.35 117.275,166.905 125.065,166.905 ; 113.075,99.49 117.07,99.49 117.175,99.595 ; 113.075,176.96 117.07,176.96 117.175,177.065 ; 115.27,42.445 115.27,44.35 118.54,47.62 124.16,47.62 ; 115.27,119.915 115.27,121.82 118.54,125.09 124.16,125.09 ; v1(115.905,64.035) 117.36,64.035 117.465,64.14 ; v1(115.905,78.64) 116.01,78.745 117.465,78.745 ; v1(115.905,93.88) 116.01,93.985 117.465,93.985 ; v1(115.905,108.485) 117.175,108.485 ; v1(115.905,141.505) 117.36,141.505 117.465,141.61 ; v1(115.905,156.11) 116.01,156.215 117.465,156.215 ; v1(115.905,171.35) 116.01,171.455 117.465,171.455 ; v1(115.905,185.955) 117.175,185.955 ; 117.465,84.885 121.965,84.885 122.15,84.885 122.255,84.99 ; 117.465,108.59 121.62,108.59 ; 117.465,162.355 121.965,162.355 122.15,162.355 122.255,162.46 ; 117.465,186.06 121.62,186.06 ; 117.57,99.595 122.255,99.595 ; 117.57,177.065 122.255,177.065 ; 117.81,42.445 117.884,42.445 119.059,43.62 124.16,43.62 ; 117.81,64.035 121.86,64.035 121.965,64.14 ; 117.81,119.915 117.884,119.915 119.059,121.09 124.16,121.09 ; 117.81,141.505 121.86,141.505 121.965,141.61 ; 117.86,78.745 121.965,78.745 ; 117.86,93.985 121.965,93.985 ; 117.86,156.215 121.965,156.215 ; 117.86,171.455 121.965,171.455 ; 121.62,108.485 121.965,108.14 121.965,105.6 123.525,104.04 125.065,104.04 ; 121.62,185.955 121.965,185.61 121.965,183.07 123.525,181.51 125.065,181.51 ; 124.16,45.62 126.065,45.62 127.335,46.89 127.335,74.195 127.335,89.435 127.335,104.04 ; 124.16,123.09 126.065,123.09 127.335,124.36 127.335,151.665 127.335,166.905 127.335,181.51 ; 127.065,104.04 127.065,104.265 127.335,104.535 ; 127.065,181.51 127.065,181.735 127.335,182.005
  Bottom Layer w0.61: v1(30.18,108.485) v1(30.18,93.88) v1(30.18,78.64) v1(30.18,64.035) 46.69,47.525 46.69,42.445 ; v1(30.18,185.955) v1(30.18,171.35) v1(30.18,156.11) v1(30.18,141.505) 46.69,124.995 46.69,119.915 ; v1(39.705,108.485) v1(39.705,93.88) v1(39.705,78.64) v1(39.705,64.035) 39.705,58.32 49.23,48.795 49.23,42.445 ; v1(39.705,185.955) v1(39.705,171.35) v1(39.705,156.11) v1(39.705,141.505) 39.705,135.79 49.23,126.265 49.23,119.915 ; v1(48.595,108.485) v1(48.595,93.88) v1(48.595,78.64) v1(48.595,64.035) 48.595,52.605 51.77,49.43 51.77,42.445 ; v1(48.595,185.955) v1(48.595,171.35) v1(48.595,156.11) v1(48.595,141.505) 48.595,130.075 51.77,126.9 51.77,119.915 ; 54.31,42.445 54.31,50.065 57.485,53.24 v1(57.485,64.035) v1(57.485,78.64) v1(57.485,93.88) v1(57.485,108.485) ; 54.31,119.915 54.31,127.535 57.485,130.71 v1(57.485,141.505) v1(57.485,156.11) v1(57.485,171.35) v1(57.485,185.955) ; v1(88.6,108.485) v1(88.6,93.88) v1(88.6,78.64) v1(88.6,64.035) 105.11,47.525 105.11,42.445 ; v1(88.6,185.955) v1(88.6,171.35) v1(88.6,156.11) v1(88.6,141.505) 105.11,124.995 105.11,119.915 ; v1(98.125,108.485) v1(98.125,93.88) v1(98.125,78.64) v1(98.125,64.035) 98.125,58.32 107.65,48.795 107.65,42.445 ; v1(98.125,185.955) v1(98.125,171.35) v1(98.125,156.11) v1(98.125,141.505) 98.125,135.79 107.65,126.265 107.65,119.915 ; v1(107.015,108.485) v1(107.015,93.88) v1(107.015,78.64) v1(107.015,64.035) 107.015,52.605 110.19,49.43 110.19,42.445 ; v1(107.015,185.955) v1(107.015,171.35) v1(107.015,156.11) v1(107.015,141.505) 107.015,130.075 110.19,126.9 110.19,119.915 ; 112.73,42.445 112.73,50.065 115.905,53.24 v1(115.905,64.035) v1(115.905,78.64) v1(115.905,93.88) v1(115.905,108.485) ; 112.73,119.915 112.73,127.535 115.905,130.71 v1(115.905,141.505) v1(115.905,156.11) v1(115.905,171.35) v1(115.905,185.955)
  other v2: 75,10 6.5,108.4 147.1,108.5 74.5,213
  other v3: 3,3 150.5,3 3,217 150.5,217

## Other copper
Top Layer:
  text "A5_TOP LAYER" at 13.75,93.75 h3 r90
Mid-Layer 1:
  text "3328_MID LAYER 1" at 13.45,94.15 h3 r90
Mid-Layer 2:
  text "3328_MID LAYER 2" at 13.15,94.95 h3 r90
Bottom Layer:
  text "A5_BOTTOM LAYER" at 13.25,94.95 h3 r90

## Silkscreen, mask and mechanical layers (free items; w line width, h text height)
Top Solder:
  text "A5_TOP SOLDER" at 13.45,93.95 h3 r90
Bottom Solder:
  text "A5_BOTTOM SOLDER" at 13.45,94.05 h3 r90
Mechanical 1:
  lines w0.254: 20.655,39.905 73.36,39.905 73.36,112.295 20.655,112.295 20.655,39.905 ; 20.655,117.375 20.655,189.765 73.36,189.765 73.36,117.375 20.655,117.375 ; 79.075,39.905 79.075,112.295 131.78,112.295 131.78,39.905 79.075,39.905 ; 79.075,117.375 131.78,117.375 131.78,189.765 79.075,189.765 79.075,117.375
Mechanical 9:
  lines w0.5: 3,3 150.5,3 150.5,217 3,217 3,3
Mechanical 10:
  rectangle: 0,0 153.5,220